# Allegro board QUADCOPTER1.brd
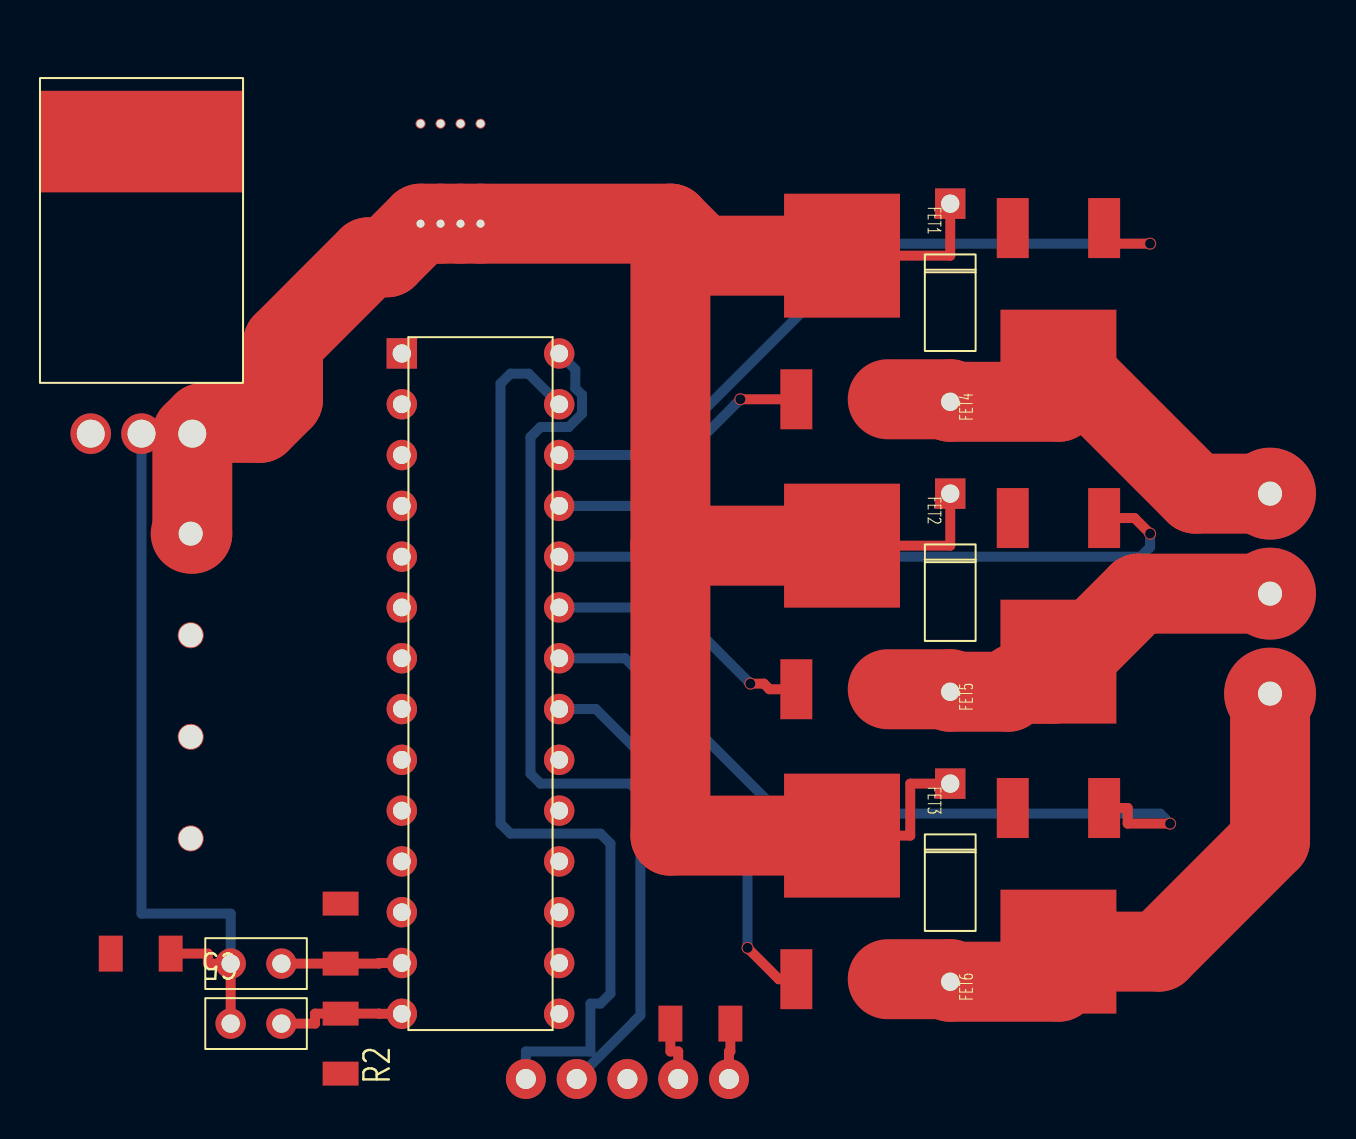
[diagram p0: board, top side]
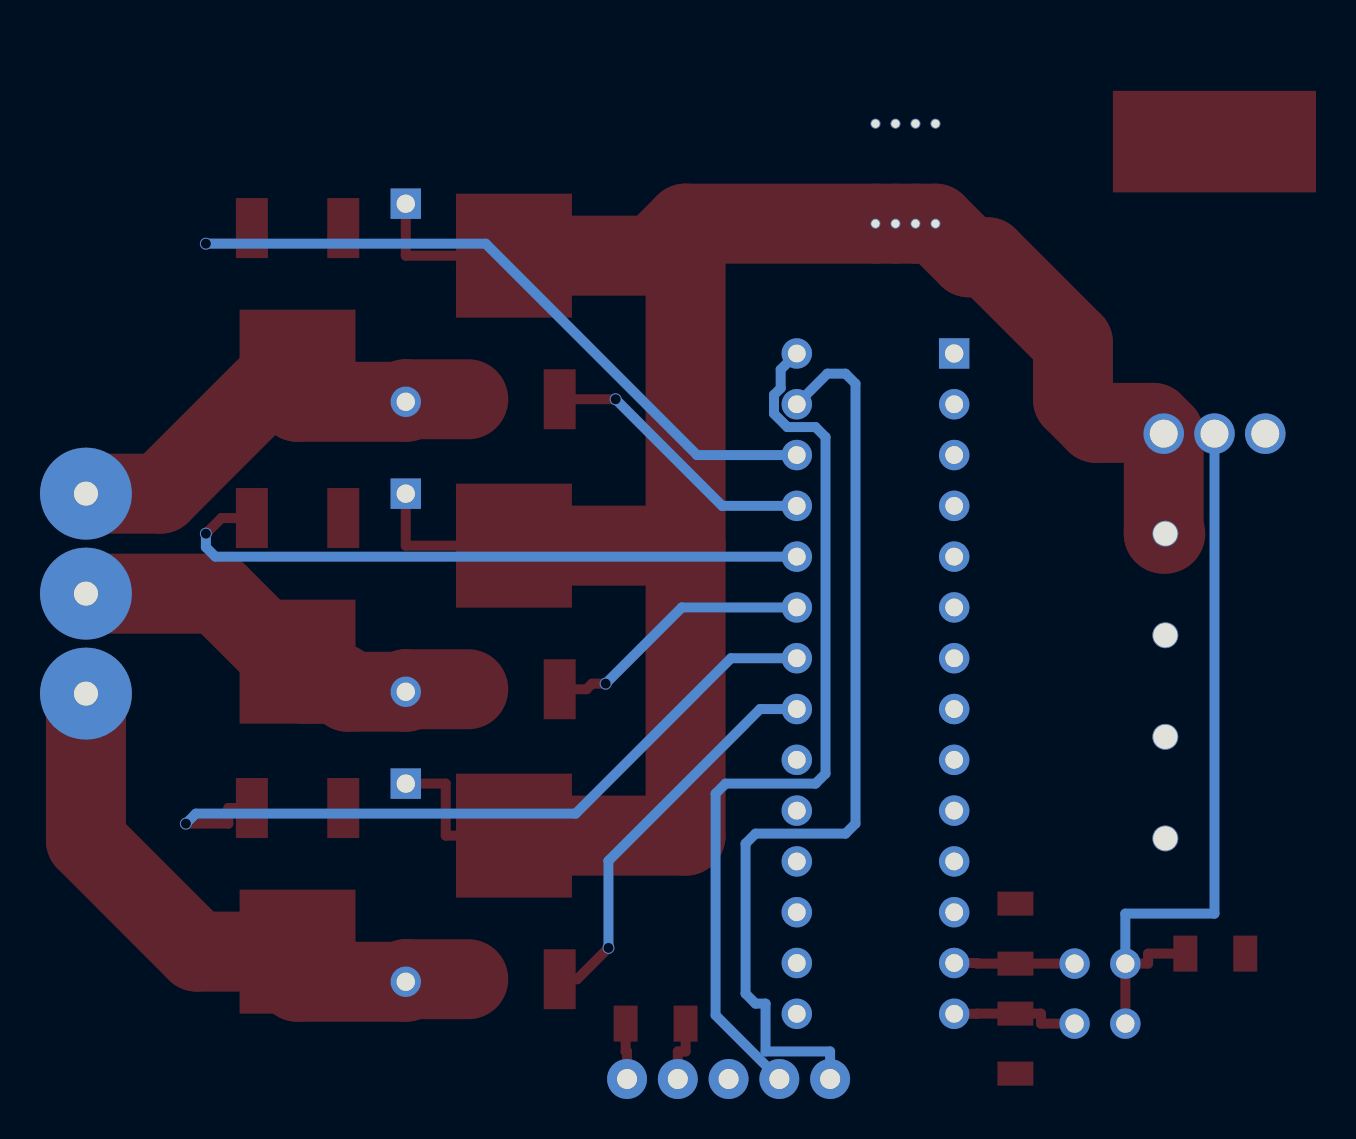
[diagram p1: board, bottom side, seen from below]

No outline. copper layers: TOP, BOTTOM. Coordinates in mm from the lowest, leftmost part position.

## Placement (name value [footprint] x y rotation side)
C5  4.7uF  [SMD_CAP_1206]  7.5 5 180 top
C6  100uF  [CAP250]  24.5 38.5 90 top
C7  100uF  [CAP250]  25.5 38.5 90 top
C8  100uF  [CAP250]  26.5 38.5 90 top
C9  100uF  [CAP250]  27.5 38.5 90 top
D1  ga6  [DO41]  48 42.5 180 top
D2  ga6  [DO41]  48 28 180 top
D3  ga6  [DO41]  48 13.5 180 top
FET1  ON NTD5867  [NTD5867]  39.5 43 270 top
FET2  ON NTD5867  [NTD5867]  39.5 28.5 270 top
FET3  ON NTD5867  [NTD5867]  39.5 14 270 top
FET4  ON NTD5867  [NTD5867]  56.5 31 90 top
FET5  ON NTD5867  [NTD5867]  56.5 16.5 90 top
FET6  ON NTD5867  [NTD5867]  56.5 2 90 top
J1  JUMPER  [JUMPER2]  12 4.5 0 top
J2  JUMPER  [JUMPER2]  12 1.5 0 top
J3  CON5  [CONN5]  25.5 0 270 top
J4  To Motor  [ED1362]  61.5 30.5 270 top
J5  To Microcontroller  [KDCONN4]  0 36 270 top
Q2  Diodes_AP1117T50L-U  [TO220-3]  5 31 270 top
R1  10k  [SMD_RES_1206]  35.5 1.5 180 top
R2  10k  [SMD_RES_1206]  17.5 0.5 90 top
R3  10k  [SMD_RES_1206]  17.5 6 270 top
U2  -  [PIC16F916]  24.5 18.5 0 top

## Library data of the parts
C5-C9 = CAP
D1-D3 = ga6
FET1-FET6 = ON NTD5867
J1 J2 = JUMPER: User Part Number: ***
J3 = CON5
J4 = CON3
J5 = 4 HEADER
Q2 = Diodes_AP1117T50L-U_1
R1-R3 = R
U2 = PIC16F916_1

## Footprints (pads in the part's own frame, mm; a bottom-side part is the same pattern mirrored in y, then rotated)
CAP250
  round 0.5 hole 0.4: 1(3,3) 2(8,3)
CONN5
  round 2 hole 1: 1(1.27,11.43) 2(1.27,8.89) 3(1.27,6.35) 4(1.27,3.81) 5(1.27,1.27)
DO41
  rect 1.524x1.524 hole 0.914: 1(0,0)
  round 1.524 hole 0.914: 2(0,9.906)
ED1362
  round 4.6 hole 1.2: 1(2.5,2.5) 2(7.5,2.5) 3(12.5,2.5)
JUMPER2
  round 1.524 hole 0.914: 1(0,0) 2(2.54,0)
KDCONN4
  round 1.3 hole 1.2: 1(10,10) 2(15.08,10) 3(20.16,10) 4(25.24,10)
NTD5867
  rect 3x1.6 smd: 1(10.28,0.8) 3(10.28,5.372)
  rect 6.2x5.8 smd: 2(3.1,3.086)
PIC16F916
  rect 1.524x1.524 hole 0.914: 1(-3.937,16.51)
  round 1.524 hole 0.889: 2(-3.937,13.97) 3(-3.937,11.43) 4(-3.937,8.89) 5(-3.937,6.35) 6(-3.937,3.81) 7(-3.937,1.27) 8(-3.937,-1.27) 9(-3.937,-3.81) 10(-3.937,-6.35) 11(-3.937,-8.89) 12(-3.937,-11.43) 13(-3.937,-13.97) 14(-3.937,-16.51) 15(3.937,-16.51) 16(3.937,-13.97) 17(3.937,-11.43) 18(3.937,-8.89) 19(3.937,-6.35) 20(3.937,-3.81) 21(3.937,-1.27) 22(3.937,1.27) 23(3.937,3.81) 24(3.937,6.35) 25(3.937,8.89) 26(3.937,11.43) 27(3.937,13.97) 28(3.937,16.51)
SMD_CAP_1206
  rect 1.2x1.8 smd: 1(-1.5,0) 2(1.5,0)
SMD_RES_1206
  rect 1.2x1.8 smd: 1(-1.5,0) 2(1.5,0)
TO220-3
  rect 5.08x10.16 smd: (-14.605,2.54)
  round 2.032 hole 1.397: 1(0,0) 2(0,2.54) 3(0,5.08)

## Nets
12V: C6.1 C7.1 C8.1 C9.1 D1.1(K) D2.1(K) D3.1(K) FET1.2(D) FET2.2(D) FET3.2(D) J5.1 Q2.3(VIN)
GND: C5.2 C6.2 C7.2 C8.2 C9.2 FET4.3(S) FET5.3(S) FET6.3(S) J3.3 J5.4 Q2.1(GND) R2.1 R3.1 U2.8(VSS#8) U2.19(VSS#19)
A: D1.2(A) FET1.3(S) FET4.2(D) J4.1
ADDR0: J1.2 R3.2 U2.13(RC2)
ADDR1: J2.2 R2.2 U2.14(RC3)
AHIGH: FET1.1(G) U2.25(RB4)
ALOW: FET4.1(G) U2.26(RB5)
B: D2.2(A) FET2.3(S) FET5.2(D) J4.2
BHIGH: FET2.1(G) U2.23(RB2)
BLOW: FET5.1(G) U2.24(RB3)
C: D3.2(A) FET3.3(S) FET6.2(D) J4.3
CHIGH: FET3.1(G) U2.21(RB0)
CLOW: FET6.1(G) U2.22(RB1)
ICPSCLK: J3.5 U2.27(ICSPCLK)
ICSPDAT: J3.4 U2.28(ICSPDAT)
NMCLR: J3.1 R1.1 U2.1($0)
SCL: J5.2 U2.17(SCL)
SDA: J5.3 U2.18(SDA)
VEXT: C5.1 J1.1 J2.1 J3.2 Q2.2(VOUT) R1.2 U2.20(VDD)

Pads without a net: U2 2 3 4 5 6 7 9 10 11 12 15 16

## Via types
v1: diameter 0.6, hole 0.5, TOP to BOTTOM, 6 vias

## Routing (per net, layer and track width the routed paths; a pad name or vN(x,y) marks a point on that pad's centre or on a via; arc(x,y) is an arc through that point)
12V: length 116.1
  TOP w0.5: FET3.2 46,10.9 46,13.5 D3.1 ; D2.1 48,25.4 FET2.2 ; FET1.2 48,39.9 D1.1
  TOP w4: FET3.2 34,10.9 34,25.4 ; 34,25.4 34,41.5 ; 34,25.4 FET2.2 ; 34,41.5 C9.1 C8.1 C7.1 C6.1 19.82,39.82 18.9,39.82 14.62,35.54 14.62,32.71 13.45,31.54 10.62,31.54 Q2.3 10.08,26 J5.1 ; 34,41.5 35.6,39.9 FET1.2
A: length 23.3
  TOP w4: FET1.3 48,32.72 D1.2 53.41,32.59 FET4.2 54.18,34.1 60.28,28 J4.1
ADDR0: length 6.1
  TOP w0.5: U2.13 19.42,4.53 19.42,4.5 R3.2 J1.2
ADDR1: length 6.5
  TOP w0.5: U2.14 19.42,1.99 19.42,2 R2.2 16.22,2 16.22,1.5 J2.2
AHIGH: length 14.1
  TOP w0.5: FET1.1 v1(37.5,32.72)
  BOTTOM w0.5: U2.25 32.17,27.39 v1(37.5,32.72)
ALOW: length 37
  TOP w0.5: v1(58,40.5) 55.7,40.5 FET4.1
  BOTTOM w0.5: v1(58,40.5) 44,40.5 33.43,29.93 U2.26
B: length 22
  TOP w4: 53.41,19 FET5.2 ; 53.41,19 53.41,18.75 53.16,18.5 51.29,18.5 50.89,18.09 D2.2 48,18.22 FET2.3 ; 53.41,19 57.41,23 J4.2
BHIGH: length 13.6
  TOP w0.5: FET2.1 38.96,18.22 38.68,18.5 v1(38,18.5)
  BOTTOM w0.5: v1(38,18.5) 34.19,22.31 U2.23
BLOW: length 33.1
  TOP w0.5: FET5.1 57.22,26.78 v1(58,26)
  BOTTOM w0.5: U2.24 57.53,24.85 58,25.32 v1(58,26)
C: length 30.4
  TOP w4: J4.3 64,10.66 58.44,5.1 FET6.2 53.41,3.59 D3.2 48,3.72 FET3.3
CHIGH: length 20
  TOP w0.5: v1(37.86,5.29) 39.43,3.72 FET3.1
  BOTTOM w0.5: v1(37.86,5.29) 37.86,9.64 30.27,17.23 U2.21
CLOW: length 38.1
  TOP w0.5: v1(59,11.5) 56.88,11.5 56.88,12.28 FET6.1
  BOTTOM w0.5: U2.22 31.73,19.77 39.5,12 58.5,12 v1(59,11.5)
ICPSCLK: length 47.4
  BOTTOM w0.5: U2.27 26.91,34 26,34 25.5,33.5 25.5,11.5 26,11 30.5,11 31,10.5 31,3 30.5,2.5 30,2.5 30,0.11 26.77,0.11 J3.5
ICSPDAT: length 44.9
  BOTTOM w0.5: J3.4 32.5,1.92 32.5,13 32,13.5 27.5,13.5 27,14 27,30.83 27.5,31.33 28.91,31.33 29.58,32 29.58,32.94 29.24,33.28 29.24,34.2 U2.28
NMCLR: length 2.8
  TOP w0.5: J3.1 36.93,0.11 37,0.11 R1.1
VEXT: length 40.6
  TOP w0.5: J3.2 34.39,0.11 34,0.11 R1.2 ; C5.1 10.86,5 10.86,4.5 J1.1 J2.1
  BOTTOM w0.5: J1.1 12,7 7.54,7 Q2.2
